# Allegro board C108P02-OLed dis-board-A03.brd
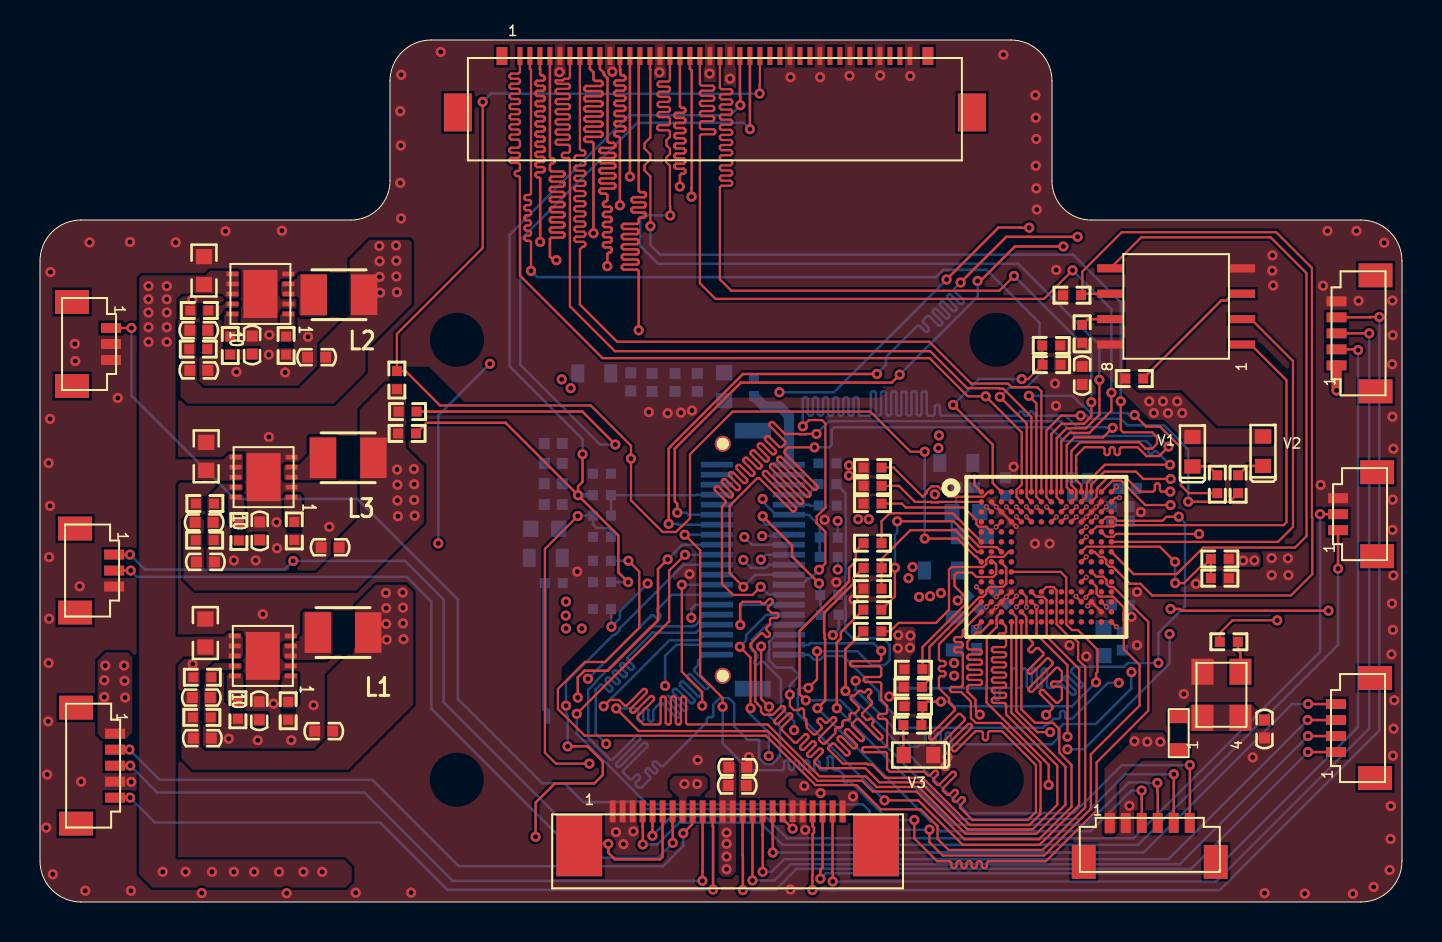
[diagram p0: board, top side]
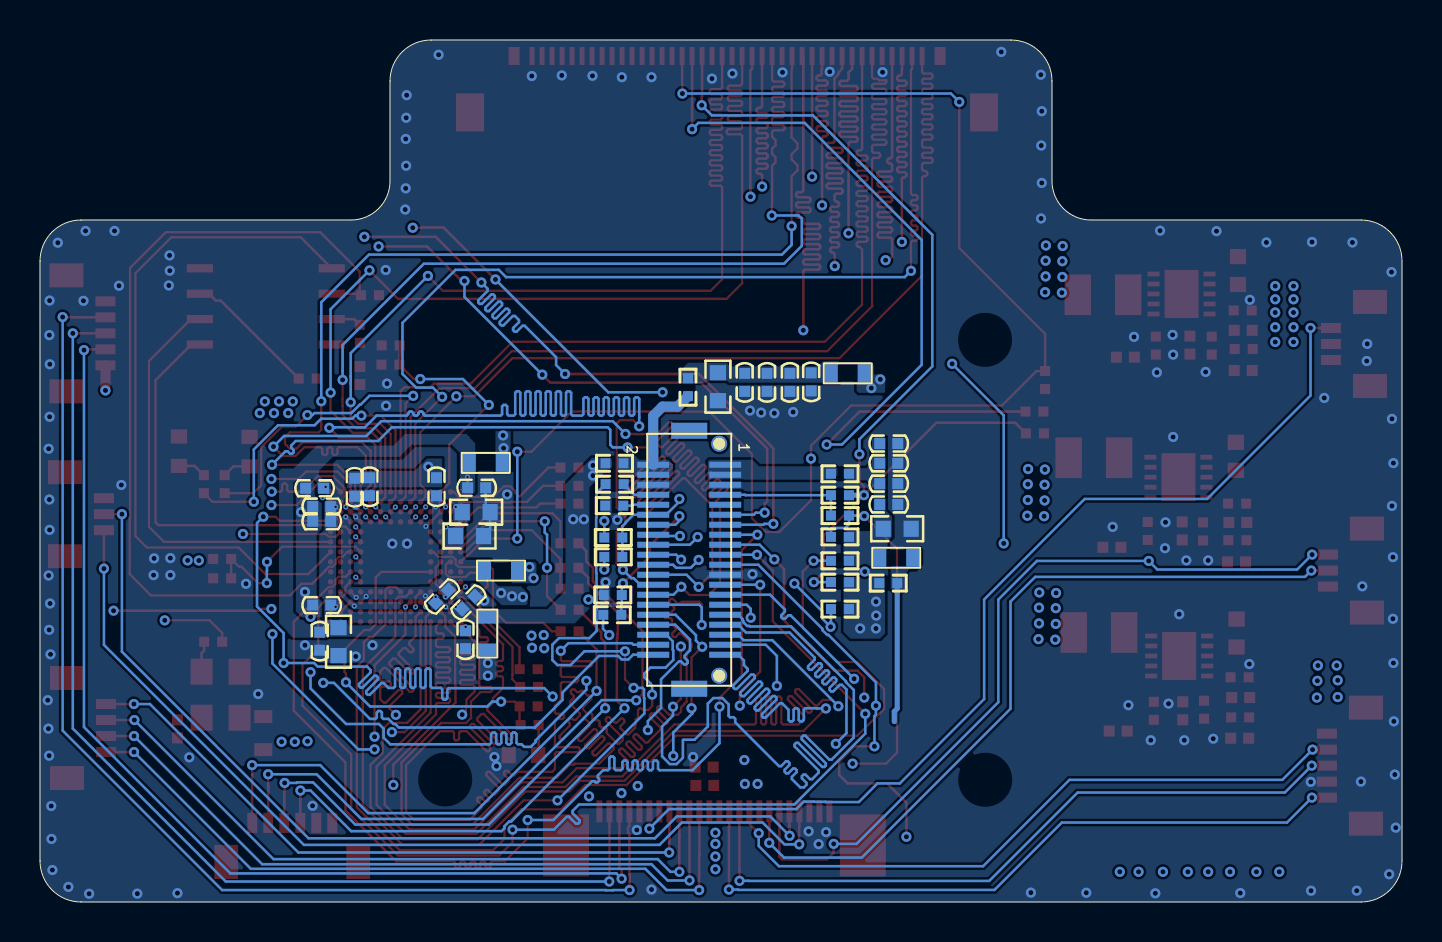
[diagram p1: board, bottom side, seen from below]

Outline 68.1 x 43.1 mm; copper layers: TOP, G, P, BOTTOM. Coordinates in mm from the lower left corner of the outline.
Outline path: 0,32.05 arc(0.6,33.5) 2.05,34.1 15.51,34.1 arc(16.93,34.67) 17.5,36.09 17.5,41.05 arc(18.1,42.5) 19.55,43.1 48.55,43.1 arc(50,42.5) 50.6,41.05 50.6,36.09 arc(51.17,34.67) 52.59,34.1 66.05,34.1 arc(67.5,33.5) 68.1,32.05 68.1,32.05 68.1,2.05 68.1,2.05 arc(67.5,0.6) 66.05,0 2.05,0 arc(0.6,0.6) 0,2.05 0,32.05

## Design rules (mm)
net group BT1120: nets VOU1120 CLK VOU1120 DATA0 VOU1120 DATA1 VOU1120 DATA2 VOU1120 DATA3 VOU1120 DATA4 VOU1120 DATA5 VOU1120 DATA6 VOU1120 DATA7 VOU1120 DATA8 VOU1120 DATA9 VOU1120 DATA10 VOU1120 DATA11 VOU1120 DATA12 VOU1120 DATA13 VOU1120 DATA14 VOU1120 DATA15
net group RGB: nets OLED0 DATA0 OLED0 DATA1 OLED0 DATA2 OLED0 DATA3 OLED0 DATA4 OLED0 DATA5 OLED0 DATA6 OLED0 DATA7 OLED0 DATA8 OLED0 DATA9 OLED0 DATA10 OLED0 DATA11 OLED0 DATA12 OLED0 DATA13 OLED0 DATA14 OLED0 DATA15 OLED0 DATA16 OLED0 DATA17 OLED0 DATA18 OLED0 DATA19 OLED0 DATA20 OLED0 DATA21 OLED0 DATA22 OLED0 DATA23 OLED0 PCLK

## Placement (name value [footprint] x y rotation side)
C1  4.7uF  [C0603]  25.24 18.66 180 bottom
C2  0.1uF  [C0402]  25.66 19.88 180 bottom
C3  0.1uF  [C0402]  25.66 20.92 180 bottom
C4  0.1uF  [C0402]  25.66 21.93 180 bottom
C5  0.1uF  [C0402]  25.66 22.92 180 bottom
C6  4.7uF  [C0603]  34.2 25.77 270 bottom
C7  0.1uF  [C0402]  32.87 25.98 270 bottom
C8  0.1uF  [C0402]  31.75 25.98 270 bottom
C9  0.1uF  [C0402]  30.61 25.98 270 bottom
C10  0.1uF  [C0402]  29.54 26.01 270 bottom
C11  0.1uF  [C0402]  34.89 6.74 0 top
C12  0.1uF  [C0402]  34.86 5.83 0 top
C13  4.7uF  [C0603]  53.18 13.02 270 bottom
C14  0.1uF  [C0402]  54.12 13.04 270 bottom
C15  0.1uF  [C0402]  46.27 20.71 180 bottom
C16  0.1uF  [C0402]  46.83 13.12 270 bottom
C17  0.1uF  [C0402]  54.37 20.69 0 bottom
C18  4.7uF  [C0603]  46.62 18.3 180 bottom
C19  0.1uF  [C0402]  48 15.28 315 bottom
C20  0.1uF  [C0402]  51.63 20.76 90 bottom
C21  0.1uF  [C0402]  48.27 20.76 90 bottom
C22  0.1uF  [C0402]  52.36 20.74 90 bottom
C27  4.7uF  [C0603]  46.29 19.49 180 bottom
C28  0.1uF  [C0402]  54.01 14.84 0 bottom
C29  0.1uF  [C0402]  46.67 14.97 135 bottom
C30  0.1uF  [C0402]  54.01 19.77 0 bottom
C31  0.1uF  [C0402]  54.01 19.04 0 bottom
C32  0.1uF  [C0402]  52.11 26.33 270 top
C33  10nF  [C0402]  61.23 8.65 90 top
C39  22pF  [C0402]  8.07 10.22 0 top
C40  4000pF  [C0402]  10.96 9.56 90 top
C41  22uF  [C0402]  14.19 8.55 0 top
C42  22uF  [C0603]  8.27 13.45 90 top
C43  22pF  [C0402]  7.94 28.59 0 top
C44  4000pF  [C0402]  10.61 27.85 90 top
C45  22uF  [C0402]  13.83 27.24 0 top
C46  22uF  [C0603]  8.2 31.57 90 top
C47  22pF  [C0402]  8.21 18.98 0 top
C48  4000pF  [C0402]  10.99 18.55 90 top
C49  22uF  [C0402]  14.51 17.74 0 top
C50  22uF  [C0603]  8.31 22.28 90 top
C51  22uF  [C0402]  8.12 8.19 180 top
C52  22uF  [C0402]  8.27 17 180 top
C53  22uF  [C0402]  7.94 26.58 180 top
D1  GW1N-9K-MBGA160  [MBGA160_8R0_8R0_0R50]  50.32 17.26 0 top
D2  GD25LQ128CSIG  [SOP8]  56.81 29.78 90 top
D3  XTAL 27MHZ  [SMD3225-4P]  59.07 10.36 90 top
J1  OLED  [DF12-40DS]  35.64 17.11 270 bottom
J2  Interface Control  [2-1734839-4]  34.38 2.88 0 top
J3  Image Processing 1  [20455-040E-76]  33.75 40.43 0 top
J5  Encoder  [SM05B-SURS-TF]  65.93 28.43 90 top
J6  Power  [SM03B-SURS-TF]  2.45 27.9 270 top
J7  Loud  [SM04B-SURS-TF]  65.9 8.7 90 top
J8  AN_LEFT  [SM03B-SURS-TF]  66 19.39 90 top
J9  AN_RIGHT  [SM03B-SURS-TF]  2.6 16.57 270 top
J10  Micro  [SM05B-SURS-TF]  2.66 6.82 270 top
L1  2.2UH  [SL1008H]  15.15 13.47 0 top
L2  2.2UH  [SL1008H]  14.95 30.36 0 top
L3  2.2UH  [SL1008H]  15.41 22.21 0 top
LB1  120R-100MHz  [L0603]  25.29 17.21 0 bottom
LB2  120R-100MHz  [L0603]  27.71 26.43 0 bottom
LB3  120R-100MHz  [L0603]  45.81 21.96 0 bottom
LB4  120R-100MHz  [L0603]  45.05 16.57 0 bottom
LB5  120R-100MHz  [L0603]  45.73 13.42 90 bottom
LB6  120R-100MHz  [L0603]  56.94 8.44 90 top
R1  10K  [R0402]  39.39 19.82 0 bottom
R2  10K  [R0402]  17.85 26.1 270 top
R3  0  [R0402]  35.7 25.74 270 bottom
R4  0  [R0402]  39.49 14.36 0 bottom
R5  NC  [R0402]  39.46 15.35 180 bottom
R6  0  [R0402]  39.44 18.22 0 bottom
R7  10K  [R0402]  28.1 15.99 0 bottom
R8  10K  [R0402]  18.38 24.52 180 top
R9  10K  [R0402]  18.35 23.43 180 top
R10  0  [R0402]  25.69 15.94 180 bottom
R12  NC  [R0402]  39.37 21.94 180 bottom
R13  0  [R0402]  39.37 20.89 0 bottom
R14  0  [R0402]  28.1 21.41 0 bottom
R15  0  [R0402]  28.1 19.32 0 bottom
R16  0  [R0402]  39.44 17.26 0 bottom
R17  0  [R0402]  28.1 20.34 0 bottom
R18  10K  [R0402]  28.1 14.65 180 bottom
R19  10K  [R0402]  28.1 18.26 0 bottom
R20  10K  [R0402]  28.1 17.06 180 bottom
R21  330  [R0402]  58.87 20.89 270 top
R22  330  [R0402]  59.91 20.89 270 top
R23  22  [R0402]  41.63 16.71 0 top
R24  22  [R0402]  41.62 14.62 0 top
R25  22  [R0402]  41.63 17.94 0 top
R26  1K  [R0402]  41.62 15.67 0 top
R27  22  [R0402]  41.62 13.53 0 top
R28  4.7K  [R0402]  52.11 28.41 270 top
R29  4.7K  [R0402]  54.71 26.17 180 top
R30  1K  [R0402]  51.6 30.34 0 top
R31  22  [R0402]  59.44 13.01 0 top
R32  4.7K  [R0402]  43.65 10.75 0 top
R33  4.7K  [R0402]  43.67 11.64 0 top
R34  4.7K  [R0402]  43.67 9.79 0 top
R35  220  [R0402]  43.62 8.85 0 top
R36  4.7K  [R0402]  41.63 20.81 0 top
R37  4.7K  [R0402]  50.58 26.87 180 top
R38  NC  [R0402]  50.56 27.83 180 top
R39  4.7K  [R0402]  41.63 21.72 0 top
R40  10K  [R0402]  41.63 19.92 0 top
R41  33  [R0402]  58.99 17.15 180 top
R42  NC  [R0402]  58.99 16.19 180 top
R45  75k  [R0402]  8.09 9.23 180 top
R46  24k  [R0402]  8.12 11.24 0 top
R47  10k  [R0402]  9.9 9.61 90 top
R48  332k  [R0402]  12.41 9.56 90 top
R49  11k  [R0402]  7.91 27.65 180 top
R50  22k  [R0402]  7.96 29.58 0 top
R51  10k  [R0402]  9.51 27.82 90 top
R52  332k  [R0402]  12.31 27.82 90 top
R53  15k  [R0402]  8.23 18.09 180 top
R54  12k  [R0402]  8.24 19.92 0 top
R55  10k  [R0402]  9.95 18.53 90 top
R56  332k  [R0402]  12.71 18.55 90 top
U3  SGM6010  [TDFN-3_3-10L]  11.14 12.3 270 top
U4  SGM6010  [TDFN-3_3-10L]  11.02 30.4 270 top
U5  SGM6010  [TDFN-3_3-10L]  11.18 21.24 270 top
V1  LED  [LED0603]  57.62 22.52 90 top
V2  LED  [LED0603]  61.15 22.54 90 top
V3  LED  [LED0603]  43.93 7.35 180 top
XS1  -  [SM06B-SURS-TF]  55.49 3.46 0 top

## Library data of the parts
C1-C12 = CAP NP: room: 1
C13-C22 C27-C33 = CAP NP: room: 2
C39-C53 = C_0: room: 3
D1 = GW1N-9K-MBGA160: room: 2
D2 = GD25LQ128CSIG: room: 2
D3 = XTAL: room: 2
J1 = OLED: room: 1
J2 = Interface Control: room: 1
J3 = Image Processing 1: room: 1
J5 = Encoder: room: 1
J6 = Power: room: 1
J7 = Loud: room: 1
J8 = AN_LEFT: room: 1
J9 = AN_RIGHT: room: 1
J10 = Micro: room: 1
L1-L3 = L: room: 3
LB1 LB2 = BEAD: room: 1
LB3-LB6 = BEAD: room: 2
R1-R10 R12-R20 = R: room: 1
R21-R42 = R: room: 2
R45-R56 = R_2: room: 3
U3-U5 = SGM6010_0: room: 3
V1-V3 = LED_1: room: 2
XS1 = SM06B-SURS-TF: room: 2

## Footprints (pads in the part's own frame, mm; a bottom-side part is the same pattern mirrored in y, then rotated)
2-1734839-4
  rect 2.3x3.1 smd: (-7.42,-0.05) (7.42,-0.05)
  rect 0.3x1.1 smd: 1(-5.75,1.65) 2(-5.25,1.65) 3(-4.75,1.65) 4(-4.25,1.65) 5(-3.75,1.65) 6(-3.25,1.65) 7(-2.75,1.65) 8(-2.25,1.65) 9(-1.75,1.65) 10(-1.25,1.65) 11(-0.75,1.65) 12(-0.25,1.65) 13(0.25,1.65) 14(0.75,1.65) 15(1.25,1.65) 16(1.75,1.65) 17(2.25,1.65) 18(2.75,1.65) 19(3.25,1.65) 20(3.75,1.65) 21(4.25,1.65) 22(4.75,1.65) 23(5.25,1.65) 24(5.75,1.65)
20455-040E-76
  rect 1.4x1.9 smd: (-12.85,-0.95) (12.85,-0.95)
  rect 0.55x0.9 smd: (-10.65,1.87) (10.65,1.87)
  rect 0.25x0.9 smd: 1(-9.75,1.87) 2(-9.25,1.87) 3(-8.75,1.87) 4(-8.25,1.87) 5(-7.75,1.87) 6(-7.25,1.87) 7(-6.75,1.87) 8(-6.25,1.87) 9(-5.75,1.87) 10(-5.25,1.87) 11(-4.75,1.87) 12(-4.25,1.87) 13(-3.75,1.87) 14(-3.25,1.87) 15(-2.75,1.87) 16(-2.25,1.87) 17(-1.75,1.87) 18(-1.25,1.87) 19(-0.75,1.87) 20(-0.25,1.87) 21(0.25,1.87) 22(0.75,1.87) 23(1.25,1.87) 24(1.75,1.87) 25(2.25,1.87) 26(2.75,1.87) 27(3.25,1.87) 28(3.75,1.87) 29(4.25,1.87) 30(4.75,1.87) 31(5.25,1.87) 32(5.75,1.87) 33(6.25,1.87) 34(6.75,1.87) 35(7.25,1.87) 36(7.75,1.87) 37(8.25,1.87) 38(8.75,1.87) 39(9.25,1.87) 40(9.75,1.87)
C0402
  rect 0.551x0.551 smd: 1(-0.45,0) 2(0.45,0)
C0603
  rect 0.762x0.813 smd: 1(-0.699,0) 2(0.699,0)
DF12-40DS
  rect 0.8x1.8 smd: (-6.45,0) (6.45,0)
  round 0.8 hole 0.6: (-5.8,1.5) (5.8,1.5)
  rect 0.3x1.6 smd: 1(-4.75,1.8) 2(-4.75,-1.8) 3(-4.25,1.8) 4(-4.25,-1.8) 5(-3.75,1.8) 6(-3.75,-1.8) 7(-3.25,1.8) 8(-3.25,-1.8) 9(-2.75,1.8) 10(-2.75,-1.8) 11(-2.25,1.8) 12(-2.25,-1.8) 13(-1.75,1.8) 14(-1.75,-1.8) 15(-1.25,1.8) 16(-1.25,-1.8) 17(-0.75,1.8) 18(-0.75,-1.8) 19(-0.25,1.8) 20(-0.25,-1.8) 21(0.25,1.8) 22(0.25,-1.8) 23(0.75,1.8) 24(0.75,-1.8) 25(1.25,1.8) 26(1.25,-1.8) 27(1.75,1.8) 28(1.75,-1.8) 29(2.25,1.8) 30(2.25,-1.8) 31(2.75,1.8) 32(2.75,-1.8) 33(3.25,1.8) 34(3.25,-1.8) 35(3.75,1.8) 36(3.75,-1.8) 37(4.25,1.8) 38(4.25,-1.8) 39(4.75,1.8) 40(4.75,-1.8)
L0603
  rect 0.65x0.9 smd: 1(-0.825,0) 2(0.825,0)
LED0603
  rect 0.711x0.813 smd: A(0.737,0) C(-0.737,0)
MBGA160_8R0_8R0_0R50
  round 0.28 smd: A1(-3.25,3.25) A2(-2.75,3.25) A3(-2.25,3.25) A4(-1.75,3.25) A5(-1.25,3.25) A6(-0.75,3.25) A7(-0.25,3.25) A8(0.25,3.25) A9(0.75,3.25) A10(1.25,3.25) A11(1.75,3.25) A12(2.25,3.25) A13(2.75,3.25) A14(3.25,3.25) B1(-3.25,2.75) B2(-2.75,2.75) B3(-2.25,2.75) B4(-1.75,2.75) B5(-1.25,2.75) B6(-0.75,2.75) B7(-0.25,2.75) B8(0.25,2.75) B9(0.75,2.75) B10(1.25,2.75) B11(1.75,2.75) B12(2.25,2.75) B13(2.75,2.75) B14(3.25,2.75) C1(-3.25,2.25) C2(-2.75,2.25) C3(-2.25,2.25) C4(-1.75,2.25) C5(-1.25,2.25) C6(-0.75,2.25) C7(-0.25,2.25) C8(0.25,2.25) C9(0.75,2.25) C10(1.25,2.25) C11(1.75,2.25) C12(2.25,2.25) C13(2.75,2.25) C14(3.25,2.25) D1(-3.25,1.75) D2(-2.75,1.75) D3(-2.25,1.75) D4(-1.75,1.75) D5(-1.25,1.75) D6(-0.75,1.75) D7(-0.25,1.75) D8(0.25,1.75) D9(0.75,1.75) D10(1.25,1.75) D11(1.75,1.75) D12(2.25,1.75) D13(2.75,1.75) D14(3.25,1.75) E1(-3.25,1.25) E2(-2.75,1.25) E3(-2.25,1.25) E4(-1.75,1.25) E11(1.75,1.25) E12(2.25,1.25) E13(2.75,1.25) E14(3.25,1.25) F1(-3.25,0.75) F2(-2.75,0.75) F3(-2.25,0.75) F4(-1.75,0.75) F11(1.75,0.75) F12(2.25,0.75) F13(2.75,0.75) F14(3.25,0.75) G1(-3.25,0.25) G2(-2.75,0.25) G3(-2.25,0.25) G4(-1.75,0.25) G11(1.75,0.25) G12(2.25,0.25) G13(2.75,0.25) G14(3.25,0.25) H1(-3.25,-0.25) H2(-2.75,-0.25) H3(-2.25,-0.25) H4(-1.75,-0.25) H11(1.75,-0.25) H12(2.25,-0.25) H13(2.75,-0.25) H14(3.25,-0.25) J1(-3.25,-0.75) J2(-2.75,-0.75) J3(-2.25,-0.75) J4(-1.75,-0.75) J11(1.75,-0.75) J12(2.25,-0.75) J13(2.75,-0.75) J14(3.25,-0.75) K1(-3.25,-1.25) K2(-2.75,-1.25) K3(-2.25,-1.25) K4(-1.75,-1.25) K11(1.75,-1.25) K12(2.25,-1.25) K13(2.75,-1.25) K14(3.25,-1.25) L1(-3.25,-1.75) L2(-2.75,-1.75) L3(-2.25,-1.75) L4(-1.75,-1.75) L5(-1.25,-1.75) L6(-0.75,-1.75) L7(-0.25,-1.75) L8(0.25,-1.75) L9(0.75,-1.75) L10(1.25,-1.75) L11(1.75,-1.75) L12(2.25,-1.75) L13(2.75,-1.75) L14(3.25,-1.75) M1(-3.25,-2.25) M2(-2.75,-2.25) M3(-2.25,-2.25) M4(-1.75,-2.25) M5(-1.25,-2.25) M6(-0.75,-2.25) M7(-0.25,-2.25) M8(0.25,-2.25) M9(0.75,-2.25) M10(1.25,-2.25) M11(1.75,-2.25) M12(2.25,-2.25) M13(2.75,-2.25) M14(3.25,-2.25) N1(-3.25,-2.75) N2(-2.75,-2.75) N3(-2.25,-2.75) N4(-1.75,-2.75) N5(-1.25,-2.75) N6(-0.75,-2.75) N7(-0.25,-2.75) N8(0.25,-2.75) N9(0.75,-2.75) N10(1.25,-2.75) N11(1.75,-2.75) N12(2.25,-2.75) N13(2.75,-2.75) N14(3.25,-2.75) P1(-3.25,-3.25) P2(-2.75,-3.25) P3(-2.25,-3.25) P4(-1.75,-3.25) P5(-1.25,-3.25) P6(-0.75,-3.25) P7(-0.25,-3.25) P8(0.25,-3.25) P9(0.75,-3.25) P10(1.25,-3.25) P11(1.75,-3.25) P12(2.25,-3.25) P13(2.75,-3.25) P14(3.25,-3.25)
R0402
  rect 0.5x0.5 smd: 1(-0.45,0) 2(0.45,0)
SL1008H
  rect 1.321x2.032 smd: 1(-1.26,0) 2(1.26,0)
SM03B-SURS-TF
  rect 1.2x1.7 smd: (-2.1,-0.85) (2.1,-0.85)
  rect 0.5x1 smd: 1(-0.8,1.1) 2(0,1.1) 3(0.8,1.1)
SM04B-SURS-TF
  rect 1.2x1.7 smd: (-2.5,-0.85) (2.5,-0.85)
  rect 0.5x1 smd: 1(-1.2,1.1) 2(-0.4,1.1) 3(0.4,1.1) 4(1.2,1.1)
SM05B-SURS-TF
  rect 1.2x1.7 smd: (-2.9,-0.85) (2.9,-0.85)
  rect 0.5x1 smd: 1(-1.6,1.1) 2(-0.8,1.1) 3(0,1.1) 4(0.8,1.1) 5(1.6,1.1)
SM06B-SURS-TF
  rect 1.2x1.7 smd: (-3.3,-1.45) (3.3,-1.45)
  rect 0.5x1 smd: 1(-2,0.5) 2(-1.2,0.5) 3(-0.4,0.5) 4(0.4,0.5) 5(1.2,0.5) 6(2,0.5)
SMD3225-4P
  rect 1.3x1.1 smd: 1(-1.15,0.95) 2(1.15,0.95) 3(1.15,-0.95) 4(-1.15,-0.95)
SOP8
  rect 0.41x1.31 smd: 1(-1.905,-3.295) 2(-0.635,-3.295) 3(0.635,-3.295) 4(1.905,-3.295) 5(1.905,3.295) 6(0.635,3.295) 7(-0.635,3.295) 8(-1.905,3.295)
TDFN-3_3-10L
  rect 0.24x0.6 smd: 1(1,1.4) 2(0.5,1.4) 3(0,1.4) 4(-0.5,1.4) 5(-1,1.4) 6(-1,-1.4) 7(-0.5,-1.4) 8(0,-1.4) 9(0.5,-1.4) 10(1,-1.4)
  rect 2.4x1.7 smd: 11(0,0)

## Nets
GND: C1.2 C2.2 C3.2 C4.2 C5.2 C6.2 C7.2 C8.2 C9.2 C10.2 C11.2 C12.2 C13.2 C14.2 C15.2 C16.2 C17.2 C18.2 C19.2 C20.2 C21.2 C22.2 C27.2 C28.2 C29.2 C30.2 C31.2 C32.2 C33.1 C40.2 C41.1 C42.2 C44.2 C45.1 C46.2 C48.2 C49.1 C50.2 C51.1 C52.1 C53.1 D1.B2(VSS#B2) D1.B13(VSS#B13) D1.C3(VSS#C3) D1.C12(VSS#C12) D1.D4(VSS#D4) D1.D11(VSS#D11) D1.L4(VSS#L4) D1.L11(VSS#L11) D1.M3(VSS#M3) D1.M12(VSS#M12) D1.N2(VSS#N2) D1.N13(VSS#N13) D2.4(VSS) D3.2(GND) J1.5 J1.6 J1.23 J2.1 J2.2 J2.3 J2.19 J2.20 J3.5 J3.10 J3.15 J3.20 J3.22 J3.28 J3.31 J3.34 J3.37 J3.40 J5.5 J6.2 J6.3 J8.3 J9.3 J10.4 R1.2 R5.1 R26.1 R30.1 R36.1 R37.1 R39.1 R40.1 R42.1 R46.1 R48.1 R50.1 R52.1 R54.1 R56.1 U3.2(GND) U3.5(PGND) U3.11(GND2) U4.2(GND) U4.5(PGND) U4.11(GND2) U5.2(GND) U5.5(PGND) U5.11(GND2) V3.C(CATHODE) XS1.2
VCC1V2: C13.1 C14.1 C15.1 C16.1 C17.1 D1.A1(VCC#A1) D1.A14(VCC#A14) D1.P1(VCC#P1) D1.P14(VCC#P14) LB3.2
VCC1V8: C18.1 C19.1 C20.1 C21.1 C22.1 C32.1 D1.C4(VCCO0#C4) D1.C11(VCCO0#C11) D1.D3(VCCO3#D3) D1.D12(VCCO1#D12) D1.L3(VCCO3#L3) D1.L12(VCCO1#L12) D1.M4(VCCO2#M4) D1.M11(VCCO2#M11) D2.8(VCC) LB4.2 LB6.1 R28.2 R29.2 R32.1 R33.1 R34.1 R38.1 R41.1 V1.A(ANODE) V2.A(ANODE) XS1.1
VCC1V8 OLED: C1.1 C2.1 C3.1 C4.1 C5.1 LB1.2 R14.1 R19.1 R20.2
VCC3V3: C27.1 C28.1 C29.1 C30.1 C31.1 D1.C2(VCCX#C2) D1.C13(VCCX#C13) D1.M2(VCCX#M2) D1.M13(VCCX#M13) J2.8 J2.24 J5.1 J10.1 LB5.2 R12.1
VCC5V OLED: C6.1 C7.1 C8.1 C9.1 C10.1 LB2.2 R3.1
AN_LEFT_1_IN: J2.4 J8.1
AN_LEFT_2_IN: J2.5 J8.2
AN_RIGHT_1_IN: J2.6 J9.1
AN_RIGHT_2_IN: J2.7 J9.2
BM_A: J2.22 J5.2
BM_B: J2.23 J5.3
BM_SWITCH_IN: J2.21 J5.4
DONE: D1.J4(IOL14A/DONE) R34.2 R35.2
FPGA FASTRD N: D1.G11(IOR13A/FASTRD_N/D3/LVDS) R41.2 R42.2
FPGA LED0: D1.B7(IOT28A/GCLKT_0) R21.2
FPGA LED1: D1.B8(IOT28B/GCLKT_0) R22.2
FPGA MCLK: D1.G12(IOR12B/MCLK/D4) D2.6(SCLK) R30.2
FPGA MCS N: D1.E12(IOR12A/MCS_N/D5) D2.1(C\S\)
FPGA MI: D1.F14(IOR11A/MI/D7/LVDS) D2.2(SO)
FPGA MO: D1.G14(IOR11B/MO/D6/LVDS) D2.5(SI)
FPGA PLL: D1.B14(IOR5A/RPLL_T_IN) R31.1
FPGA SCL: D1.M6(IOB17B/LVDS) R15.1 R19.2
FPGA SDA: D1.L7(IOB21A/LVDS/X16) R6.2 R20.1
FPGA TCK: D1.G1(IOL11B/TCK/LVDS) R23.2 R26.2
FPGA TDI: D1.G4(IOL12B/TDI) R27.2
FPGA TDO: D1.G3(IOL13A/TDO/LVDS) R24.2
FPGA TMS: D1.F1(IOL11A/TMS/LVDS) R25.2
JTAGSEL N: D1.E2(IOL5A/JTAGSEL_N/LPLL_T_IN) R40.2
MODE0: D1.B1(IOT5A/MODE0) R36.2
MODE1: D1.A3(IOT6B/MODE1) R37.2 R38.2
MODE2: D1.A2(IOT5B/MODE2) R39.2
OLED0 DATA0: D1.P5(IOB15B/LVDS) J1.39
OLED0 DATA1: D1.L1(IOB4A/LVDS/X16) J1.40
OLED0 DATA2: D1.N5(IOB15A/LVDS/X16) J1.37
OLED0 DATA3: D1.M1(IOB4B/LVDS) J1.38
OLED0 DATA4: D1.P4(IOB13B/LVDS) J1.35
OLED0 DATA5: D1.N1(IOB6A/LVDS/X16) J1.36
OLED0 DATA6: D1.N4(IOB13A/LVDS/X16) J1.33
OLED0 DATA7: D1.P2(IOB6B/LVDS) J1.34
OLED0 DATA8: D1.M5(IOB11B/LVDS) J1.31
OLED0 DATA9: D1.N3(IOB8A/LVDS/X16) J1.32
OLED0 DATA10: D1.L5(IOB11A/LVDS/X16) J1.29
OLED0 DATA11: D1.P3(IOB8B/LVDS) J1.30
OLED0 DATA12: D1.E13(IOR8B/LVDS) J1.27
OLED0 DATA13: D1.A11(IOT36A) J1.28
OLED0 DATA14: D1.D13(IOR8A/LVDS) J1.25
OLED0 DATA15: D1.A10(IOT36B) J1.26
OLED0 DATA16: D1.K12(IOR26A/LVDS) J1.19
OLED0 DATA17: D1.B12(IOT38B) J1.22
OLED0 DATA18: D1.H11(IOR24B/LVDS) J1.17
OLED0 DATA19: D1.A12(IOT42A) J1.20
OLED0 DATA20: D1.J12(IOR24A/LVDS) J1.15
OLED0 DATA21: D1.A13(IOT42B) J1.18
OLED0 DATA22: D1.F11(IOR22B/LVDS) J1.13
OLED0 DATA23: D1.D10(IOT44A) J1.16
OLED0 DE: D1.K11(IOR26B/LVDS) J1.21
OLED0 HS: D1.E11(IOR22A/LVDS) J1.11
OLED0 PCLK: D1.B11(IOT38A) J1.24
OLED0 SERADD: J1.10 R1.1
OLED0 VS F: D1.C10(IOT44B) R4.2
OLED0 VS_F: J1.14 R4.1 R5.2
OLED IMAGE RESET: D1.H1(IOL17A/LVDS) J3.25 R2.1
OLED RESET: D1.L6(IOB17A/LVDS/X16) R13.2
OLED SCL: J3.23 R7.2 R9.1 R17.1
OLED SDA: J1.12 J3.24 R6.1 R8.1 R16.1
OLED_RESET: J1.8 R13.1
POW1V2: C43.1 C45.2 C53.2 L2.2 LB3.1 R49.2
POW1V8: C47.1 C49.2 C52.2 L3.2 LB4.1 R2.2 R7.1 R8.2 R9.2 R10.1 R18.2 R53.2
POW3V3: C39.1 C41.2 C51.2 L1.2 LB5.1 R45.2
POW5V: C11.1 C12.1 C42.1 C46.1 C50.1 J2.12 J2.13 LB2.1 U3.6(PVDD1) U3.7(PVDD2) U3.8(AVDD) U4.6(PVDD1) U4.7(PVDD2) U4.8(AVDD) U5.6(PVDD1) U5.7(PVDD2) U5.8(AVDD)
READY: D1.H2(IOL14B/READY) R33.2
RECONFIG N: D1.H3(IOL13B/RECONFIG_N/LVDS) R32.2
SCK: J2.11 J10.5
SD: J2.10 J10.3
SD_AN: J2.18 J6.1
SP_N1: J2.16 J7.3
SP_N2: J2.17 J7.4
SP_P1: J2.14 J7.1
SP_P2: J2.15 J7.2
VOU1120 CLK: D1.A8(IOT30A) J3.21
VOU1120 DATA0: D1.B5(IOT14A) J3.1
VOU1120 DATA1: D1.B6(IOT14B) J3.2
VOU1120 DATA2: D1.C5(IOT18A) J3.3
VOU1120 DATA3: D1.D5(IOT18B) J3.4
VOU1120 DATA4: D1.A6(IOT22A) J3.6
VOU1120 DATA5: D1.A7(IOT22B) J3.7
VOU1120 DATA6: D1.C6(IOT24A) J3.8
VOU1120 DATA7: D1.D6(IOT24B) J3.9
VOU1120 DATA8: D1.C7(IOT26A) J3.11
VOU1120 DATA9: D1.C9(IOT34B) J3.12
VOU1120 DATA10: D1.D9(IOT34A) J3.13
VOU1120 DATA11: D1.B10(IOT33B) J3.14
VOU1120 DATA12: D1.B9(IOT33A/X16) J3.16
VOU1120 DATA13: D1.D8(IOT32B) J3.17
VOU1120 DATA14: D1.C8(IOT32A) J3.18
VOU1120 DATA15: D1.A9(IOT30B) J3.19
WS: J2.9 J10.2
N69070: J1.2 J1.4 R3.2 R12.2
N75676: J1.1 J1.3 R14.2
N14665792: R23.1 XS1.3
N14665882: R24.1 XS1.4
N14665886: R25.1 XS1.5
N14665890: R27.1 XS1.6
N14667687: D2.7(H\O\L\D\) R28.1
N14668737: D2.3(W\P\) R29.1
N14669383: C33.2 D3.1(TRI-STATE) D3.4(VCC) LB6.2
N14669821: D3.3(OUTPUT) R31.2
N14977713: R48.2 U3.1(E\N\/RT)
N14977721: L1.1 U3.3(SW1) U3.4(SW2)
N14977791: C39.2 R45.1 R46.2 U3.9(FB)
N14977811: R47.2 U3.10(COMP)
N14977909: C40.1 R47.1
N14978938: L2.1 U4.3(SW1) U4.4(SW2)
N14978992: C43.2 R49.1 R50.2 U4.9(FB)
N14978996: R51.2 U4.10(COMP)
N14979110: C44.1 R51.1
N14979344: R52.2 U4.1(E\N\/RT)
N14980095: L3.1 U5.3(SW1) U5.4(SW2)
N14980165: C47.2 R53.1 R54.2 U5.9(FB)
N14980169: R55.2 U5.10(COMP)
N14980283: C48.1 R55.1
N14980517: R56.2 U5.1(E\N\/RT)
N15019447: LB1.1 R10.2
N15020889: J1.7 R15.2 R17.2
N15022206: R16.2 R18.1
N15041456: R21.1 V1.C(CATHODE)
N146648081: R22.1 V2.C(CATHODE)
N146708610: R35.1 V3.A(ANODE)

Pads without a net: D1 A4 A5 B3 B4 C1 C14 D1 D2 D7 D14 E1 E3 E4 E14 F2 F3 F4 F12 F13 G2 G13 H4 H12 H13 H14 J1 J2 J3 J11 J13 J14 K1 K2 K3 K4 K13 K14 L2 L8 L9 L10 L13 L14 M7 M8 M9 M10 M14 N6 N7 N8 N9 N10 N11 N12 N14 P6 P7 P8 P9 P10 P11 P12 P13; J1 9; J3 26 27 29 30 32 33 35 36 38 39

## Via types
v1: diameter 0.508, hole 0.254, TOP to BOTTOM, 402 vias
v2: diameter 0.254, hole 0.127, TOP to BOTTOM, 43 vias

## Routing (per net, layer and track width the routed paths; a pad name or vN(x,y) marks a point on that pad's centre or on a via; arc(x,y) is an arc through that point)
GND: length 8.2
  TOP w0.114: D1.N13 D1.M12 52.38,14.82 v2(52.38,14.8) ; D1.L4 v2(48.32,15.26) D1.M3 v2(47.82,14.76) D1.N2 ; D1.B2 v2(47.82,19.76) D1.C3 D1.D4 48.8,18.78 v2(48.81,18.78) ; D1.B13 v2(52.81,19.75) D1.C12 v2(52.32,19.26) D1.D11
  BOTTOM w0.127: C15.2 45.82,19.72 45.59,19.49 45.59,18.63 45.92,18.3
  vias: v1(0.36,6.37) v1(0.31,3.72) v1(0.43,21.95) v1(0.45,17.24) v1(0.45,14.16) v1(0.43,11.95) v1(0.41,9.03) v1(0.52,31.5) v1(0.5,24.16) v1(0.5,19.81) v1(0.64,1.39) v1(1.74,27.91) v1(1.76,27.05) v1(1.98,15.78) v1(2.05,6.02) v1(2.26,0.56) v1(2.48,32.98) v1(3.89,25.2) v1(4.5,33) v1(4.56,6.01) v1(4.55,0.56) v1(6.78,32.98) v1(7.61,30.11) v1(7.63,11.9) v1(8.09,0.45) v1(9.28,33.54) v1(9.44,8.16) v1(9.69,17.08) v1(9.82,26.5) v1(10.78,17.08) v1(10.89,8.09) v1(11.14,14.39) v1(11.47,28.36) v1(11.44,27.37) v1(11.44,23.25) v1(11.67,9.92) v1(11.83,18.99) v1(11.85,17.69) v1(12.1,33.57) v1(12.26,26.48) v1(12.33,0.44) v1(12.56,8.09) v1(13.4,28.26) v1(13.68,9.84) v1(14.47,18.76) v1(15.79,0.46) v1(18.06,41.36) v1(18.01,39.54) v1(18.04,37.82) v1(18.01,35.95) v1(18.05,34.18) v1(18.56,0.47) v1(20.04,42.51) v1(25.97,41.49) v1(26.86,16.52) v1(28.61,41.51) v1(28.8,3.49) v1(29.17,2.89) v1(29.67,3.53) v1(30.44,24.5) v1(30.97,41.48) v1(31.38,24.44) v1(32.04,24.47) v1(32.48,16.39) v1(32.6,24.57) v1(32.88,7.1) v1(33.48,41.42) v1(34.5,41.17) v1(35.45,7.25) v1(37.53,41.24) v1(37.53,0.62) v1(38.26,3.6) v1(39.01,41.24) v1(39.23,19.11) v1(39.82,15.99) v1(40.48,41.31) v1(40.68,15.12) v1(42.01,41.33) v1(43.51,41.3) v1(44.74,20.38) v1(45.28,6.79) v1(45.38,7.25) v1(45.89,15.07) v1(48.17,42.36) v1(48.68,21.76) v1(49.77,40.34) v1(49.75,17.92) v1(49.79,39.21) v1(49.81,38.15) v1(49.79,36.81) v1(49.82,35.68) v1(49.84,34.62) v1(50.48,17.92) v1(50.75,25.92) v1(50.81,31.6) v1(50.8,24.81) v1(51.47,12.84) v1(52.31,12.28) v1(54.47,4.81) v1(54.57,14.26) v1(54.85,15.51) v1(54.85,12.84) v1(55.04,19.49) v1(57.19,10.4) v1(57.8,15.91) v1(60.64,7.23) v1(61.23,0.44) v1(61.58,17.19) v1(61.58,16.34) v1(61.62,32.33) v1(61.61,31.57) v1(61.66,30.83) v1(62.4,17.18) v1(62.42,16.34) v1(63.24,0.42) v1(64.04,20.85) v1(64.15,30.81) v1(64.38,33.55) v1(65.65,0.41) v1(65.82,33.55) v1(65.93,30.06) v1(66.68,0.75) v1(67.21,32.97) v1(67.48,1.6) v1(67.58,12.38) v1(67.54,4.8) v1(67.53,3.15) v1(67.62,30.07) v1(67.63,28.34) v1(67.61,26.89) v1(67.62,24.26) v1(67.67,22.66) v1(67.63,20.12) v1(67.62,18.61) v1(67.67,16.33) v1(67.6,14.93) v1(67.64,13.61) v1(67.68,8.67) v1(67.64,7.32) v1(67.72,10.09)
VCC1V2: length 2.5
  TOP w0.114: D1.A1 46.73,20.85 v2(46.73,21.25) ; D1.A14 v2(53.82,20.76) ; D1.P14 v2(53.82,13.76) ; D1.P1 v2(46.82,13.76)
  BOTTOM w0.102: C15.1 46.72,21.24 v2(46.73,21.25)
VCC1V8: length 3
  TOP w0.114: v2(51.79,15.28) D1.M11 ; D1.D3 v2(47.81,18.75) ; D1.C11 v2(52.32,19.76) ; D1.D12 v2(52.82,19.26) ; D1.C4 v2(48.32,19.76) ; v2(48.83,15.3) 48.57,15.04 D1.M4 ; v2(52.29,15.23) D1.L12 ; D1.L3 v2(47.82,15.26)
  vias: v1(42.89,12.69) v1(42.92,13.35) v1(43.52,13.32) v1(43.5,12.71) v1(43.96,15.25) v1(44.51,15.29) v1(45.05,15.45) v1(54.73,8.04) v1(55.36,8.01) v1(55.46,25.03) v1(55.69,24.45) v1(56.02,8.01) v1(56.15,25.03) v1(56.4,24.45) v1(56.86,25.03) v1(57.11,24.45) v1(60.16,17.07) v1(60.72,17.08)
VCC3V3: length 50.9
  TOP w0.114: v2(47.32,14.76) D1.M2 ; D1.C2 v2(47.32,19.76) ; D1.C13 v2(53.32,19.76) ; D1.M13 v2(53.32,14.76) ; 3.39,8.42 J10.1
  TOP w0.508: J5.1 v1(64.83,25.58)
  P w0.508: v1(64.83,25.58) 65.9,24.51 65.9,16.19 65.52,15.81 64.28,15.81 62.73,14.26 62.73,4.46 60.57,2.3 43.63,2.3 v1(40.65,5.28)
  vias: v1(3.27,11.82) v1(3.21,11.09) v1(3.21,10.25) v1(4.21,11.82) v1(4.23,11.06) v1(4.26,10.22) v1(32.22,5.9) v1(32.86,5.9) v1(38.22,5.8) v1(39.03,5.45) v1(40.45,21.83) v1(40.45,21.32) v1(40.91,19.14) v1(41.44,19.14)
AN_LEFT_1_IN: length 47.2
  TOP w0.127: J2.4 30.13,3.79 30.14,3.78 v1(30.14,2.88) ; J8.1 v1(64.9,16.67)
  BOTTOM w0.127: v1(64.9,16.67) 64.9,12.86 54.9,2.86 37.12,2.86 36.01,3.97 31.97,3.97 30.88,2.88 v1(30.14,2.88)
AN_LEFT_2_IN: length 47.1
  TOP w0.127: J2.5 30.63,3.79 30.62,3.78 v1(30.62,3.31) ; J8.2 v1(64,19.39)
  BOTTOM w0.127: v1(64,19.39) 64,12.52 54.68,3.19 37.35,3.19 36.26,4.28 31.59,4.28 v1(30.62,3.31)
AN_RIGHT_1_IN: length 39.7
  TOP w0.127: J9.1 v1(4.5,17.37) ; J2.6 31.13,2.26 31,2.13 28.74,2.13 28.42,2.46 v1(28.42,2.91)
  BOTTOM w0.127: v1(4.5,17.37) 5.24,16.62 12.23,16.62 v1(12.66,17.05) 18.25,17.05 20.18,15.12 20.18,9.99 27.27,2.91 v1(28.42,2.91)
AN_RIGHT_2_IN: length 38.9
  TOP w0.127: v1(31.64,2.96) 31.64,3.78 31.63,3.79 J2.7 ; J9.2 v1(4.54,16.57)
  BOTTOM w0.127: v1(31.64,2.96) 30.9,2.22 27.01,2.22 19.57,9.66 19.57,15.02 18.34,16.26 4.85,16.26 v1(4.54,16.57)
BM_A: length 53.4
  TOP w0.127: v1(65.9,27.6) 65.86,27.63 J5.2 ; v1(39.02,1.17) 39.02,1.61 39.13,1.72 J2.22
  BOTTOM w0.127: v1(65.9,27.6) 65.9,8.75 58.58,1.43 39.28,1.43 v1(39.02,1.17)
BM_B: length 54.9
  TOP w0.127: J5.3 v1(66.46,28.43) ; J2.23 39.63,3.79 39.63,3.79 39.63,1.48 39.64,1.47 v1(39.64,1.02)
  BOTTOM w0.127: v1(39.64,1.02) 58.81,1.02 66.46,8.67 v1(66.46,28.43)
BM_SWITCH_IN: length 58.5
  TOP w0.127: J5.4 66.51,29.23 66.52,29.25 v1(66.97,29.25) ; v1(38.62,0.6) 38.62,1.04 38.61,1.05 38.61,1.33 38.63,1.35 38.63,3.39 38.7,3.46 38.7,3.72 38.63,3.79 J2.21
  BOTTOM w0.127: v1(66.97,29.25) 66.97,8.57 58.99,0.6 39.81,0.6 39.79,0.58 39.46,0.58 39.44,0.6 v1(38.62,0.6)
DONE: length 19.3
  TOP w0.114: R35.2 44.12,8.9 R34.2 44.36,10.02 v1(45.05,10.02) ; v1(52.8,10.98) 52.8,11.43 52.87,11.5 52.87,12.62 51.9,13.6 51.6,13.6 51.31,13.88 51.31,16.22 51.03,16.51 D1.J4
  BOTTOM w0.127: v1(45.05,10.02) 45.49,10.02 45.73,9.78 51.6,9.78 v1(52.8,10.98)
FPGA FASTRD N: length 9.4
  TOP w0.114: v1(56.76,15.94) 57.21,15.94 58.03,16.77 58.16,16.77 R41.2 R42.2 ; D1.G11 52.33,17.77 55.99,17.77 v1(56.75,17.01)
  BOTTOM w0.127: v1(56.75,17.01) 56.75,16.56 56.76,16.56 v1(56.76,15.94)
FPGA LED0: length 18.1
  TOP w0.114: v1(54.73,24.35) 55.19,23.88 55.31,23.77 56,23.77 57.04,22.73 57.04,20.84 57.44,20.44 58.41,20.44 58.41,20.44 R21.2 ; D1.B7 49.82,20.26 49.82,24.43 49.82,24.43 49.82,24.93 v1(49.44,25.31)
  BOTTOM w0.127: v1(54.73,24.35) 54.48,24.35 54.38,24.45 52.53,24.45 52.1,24.88 52.06,24.88 51.63,25.31 v1(49.44,25.31)
FPGA LED1: length 17.1
  TOP w0.114: R22.2 59.48,20.01 57.86,20.01 v1(57.41,20.01) ; D1.B8 50.55,20.01 50.32,20.24 50.32,23.58 51.06,24.32 v1(52.03,24.32)
  BOTTOM w0.127: v1(52.03,24.32) 52.34,24.32 52.49,24.17 54.04,24.17 54.37,23.84 56.2,23.84 57.41,22.62 v1(57.41,20.01)
FPGA MCLK: length 43.5
  TOP w0.114: 52.12,30.41 R30.2 ; 52.12,30.41 52.12,30.42 D2.6 ; 52.12,30.41 52.12,31.52 54.09,33.49 61.81,33.49 63.6,31.7 63.6,19.22 63.62,19.21 63.62,16.39 62.55,15.33 55.61,15.33 55.02,15.91 54.49,15.91 53.81,16.59 53.81,16.61 53.67,16.75 53.65,16.75 53.64,16.76 53.47,16.76 53.31,16.92 53.31,17.11 53.17,17.25 52.99,17.25 52.73,17.51 D1.G12
FPGA MCS N: length 20
  TOP w0.114: D1.E12 52.83,18.77 53.67,18.77 53.74,18.84 62.18,18.84 62.33,18.99 62.33,26.09 60.54,27.88 D2.1
FPGA MI: length 21.1
  TOP w0.114: D1.F14 57.78,18.01 57.79,18 58.12,18 58.12,18.01 61.9,18.01 62.65,18.76 62.65,27.05 60.55,29.15 D2.2
FPGA MO: length 35.4
  TOP w0.114: D1.G14 54.68,16.4 56.84,16.4 58.16,17.72 62.75,17.72 63.33,18.3 63.33,31.44 61.53,33.24 55.07,33.24 D2.5
FPGA PLL: length 29.3
  TOP w0.114: v2(53.97,20.22) 53.96,20.22 53.95,20.2 53.77,20.2 D1.B14 ; v1(61.86,14.08) 59.62,14.08 58.99,13.45 R31.1
  P w0.127: v2(53.97,20.22) 54.2,20.44 54.2,24.62 54.57,25 54.57,25.92 54.7,26.05 60.31,26.05 62.9,23.46 62.9,15.12 v1(61.86,14.08)
FPGA SCL: length 54.8
  TOP w0.114: v1(51.37,8.27) 51.37,11.84 49.83,13.38 49.83,13.91 49.83,13.91 49.83,14.61 49.83,14.61 v2(49.83,14.76) 49.83,14.78 49.6,15.01 D1.M6 ; v1(26.89,19.3) 25.25,17.66 25.25,7.47 25.8,6.92 v1(27.47,6.92)
  P w0.127: v1(51.37,8.27) 51.86,7.78 51.86,4.91 50.81,3.87 45.38,3.87 42.67,6.58 31.44,6.58 31.3,6.44 27.95,6.44 v1(27.47,6.92)
  BOTTOM w0.127: v1(26.89,19.3) 26.91,19.32 R15.1 27.65,18.88 27.83,18.7 28.43,18.7 28.55,18.57 R19.2
FPGA SDA: length 69.8
  TOP w0.114: D1.L7 50.31,15.75 50.67,15.75 50.83,15.59 50.83,13.89 51.47,13.24 51.64,13.24 51.69,13.19 51.7,13.19 51.91,12.99 51.91,12.45 51.91,12.45 51.91,12.11 52.26,11.76 52.26,4.74 50.13,2.6 45.43,2.6 44.88,3.15 44.88,3.79 44.03,4.63 42.04,4.63 40.94,5.73 40.93,5.73 40.82,5.85 38.77,5.85 36.3,8.32 27.23,8.32 26.14,9.41 26.14,9.41 25.9,9.65 25.9,10.65 27.24,12 28.26,12 29.96,13.7 29.96,16.52 v1(29.42,17.06)
  P w0.127: v1(39.89,19.05) 39.86,19.05 39.4,19.52 39.06,19.52 38.6,19.05 37.44,19.05 36.74,19.75 35.96,19.75 34.77,20.94 30.01,20.94 29.42,20.35 v1(29.42,17.06)
  BOTTOM w0.127: R6.2 v1(39.89,19.05) ; R20.1 28.55,17.06 v1(29.42,17.06)
FPGA TCK: length 7.5
  TOP w0.114: R26.2 42.08,15.67 R23.2 42.08,17.15 43.52,18.59 45.77,18.59 46.86,17.5 47.06,17.5 D1.G1
FPGA TDI: length 9.5
  TOP w0.114: D1.G4 48.43,17.51 48.17,17.25 47.78,17.25 47.78,17.26 47.46,17.26 47.32,17.11 47.32,16.9 47.17,16.75 45.58,16.75 45.45,16.62 45.45,14.61 44.79,13.96 42.93,13.96 42.5,13.53 R27.2
FPGA TDO: length 10.6
  TOP w0.114: R24.2 42.75,15.29 v1(42.75,16.71) ; v1(42.86,19.04) 45.68,19.04 46.09,18.63 46.09,18.63 46.97,17.75 47.67,17.75 47.68,17.74 47.84,17.74 D1.G3
  BOTTOM w0.127: v1(42.86,19.04) 42.86,18.48 42.75,18.36 v1(42.75,16.71)
FPGA TMS: length 6.9
  TOP w0.114: R25.2 42.08,19.04 42.47,19.43 42.69,19.43 42.7,19.44 43.03,19.44 43.04,19.43 45.64,19.43 D1.F1
JTAGSEL N: length 6.2
  TOP w0.114: D1.E2 47.31,18.77 46.94,18.77 46.82,18.89 46.82,19.1 46.19,19.73 43.29,19.73 43.09,19.92 R40.2
MODE0: length 5.3
  TOP w0.114: D1.B1 44.94,20.01 44.91,19.98 44.58,19.98 44.55,20.01 43.75,20.01 42.95,20.81 R36.2
MODE1: length 11.7
  TOP w0.114: D1.A3 47.63,20.94 47.63,22.88 v1(45.66,24.85) ; v1(49.09,26.15) 49.41,26.15 R37.2 50.13,27.37 50.11,27.39 R38.2 50.17,27.78
  BOTTOM w0.127: v1(45.66,24.85) 46.95,26.15 v1(49.09,26.15)
MODE2: length 6.7
  TOP w0.114: R39.2 42.68,21.72 44.14,20.26 44.34,20.47 44.34,20.55 44.58,20.78 44.91,20.78 45.43,20.26 47.16,20.26 47.41,20.51 D1.A2
OLED0 DATA0: length 56.4
  TOP w0.114: D1.P5 49.07,9.64 49.75,8.96 50.13,8.96 50.14,8.95 50.47,8.95 50.49,8.96 50.65,8.96 50.97,8.65 50.97,7.46 51.58,6.85 51.58,4.76 49.95,3.14 46.22,3.14 43.83,5.52 41.64,5.52 41.1,6.06 38.88,6.06 36.39,8.55 32.92,8.55 29.93,8.55 v1(28.81,9.68)
  BOTTOM w0.127: J1.39 33.19,12.36 32.91,12.08 32.91,11.85 32.72,11.66 32.72,11.55 33.44,10.83 33.44,10.73 33.36,10.65 33.26,10.65 32.54,11.37 32.43,11.37 32.36,11.3 32.36,11.19 33.08,10.47 33.08,10.37 33.01,10.29 32.9,10.29 32.18,11.01 32.07,11.01 32,10.94 32,10.84 32.72,10.11 32.72,10.01 32.65,9.94 32.54,9.94 31.82,10.66 31.72,10.66 31.64,10.58 31.64,10.48 32.36,9.76 32.36,9.65 32.29,9.58 32.18,9.58 31.46,10.3 31.36,10.3 31.28,10.22 31.28,10.12 32,9.4 32,9.29 31.93,9.22 31.82,9.22 31.1,9.94 31,9.94 30.67,9.61 30.67,9.1 30.6,9.03 30.49,9.03 30.42,9.1 30.42,9.61 30.35,9.69 30.24,9.69 30.17,9.61 30.17,9.1 30.09,9.03 29.99,9.03 29.91,9.1 29.91,9.61 29.84,9.69 29.26,9.69 29.25,9.68 v1(28.81,9.68)
OLED0 DATA1: length 56.5
  TOP w0.114: D1.L1 47.07,15.51 46.83,15.76 v2(46.83,15.76)
  P w0.127: v2(46.83,15.76) 46.5,15.76 46.15,15.42 46.15,15.38 46.29,15.24 46.29,14.77 47.36,13.7 47.36,13.23 47.65,12.95 47.75,12.95 49.15,14.34 49.26,14.34 49.33,14.27 49.33,14.17 47.93,12.77 47.93,12.66 48.01,12.59 48.11,12.59 49.51,13.99 49.62,13.99 49.69,13.91 49.69,13.81 48.29,12.41 48.29,12.3 48.37,12.23 48.47,12.23 49.87,13.63 49.98,13.63 50.05,13.55 50.05,13.45 48.65,12.05 48.65,11.94 48.73,11.87 48.83,11.87 50.23,13.27 50.33,13.27 50.41,13.19 50.41,13.09 49.01,11.69 49.01,11.58 49.09,11.51 49.19,11.51 50.59,12.91 50.69,12.91 50.77,12.83 50.77,12.73 49.37,11.33 49.37,11.22 49.66,10.94 49.66,10.87 49.68,10.84 50.4,10.84 50.47,10.92 50.47,11.93 50.55,12 50.65,12 50.73,11.93 50.73,10.92 50.8,10.84 50.91,10.84 50.98,10.92 50.98,11.93 51.06,12 51.16,12 51.24,11.93 51.24,10.92 51.31,10.84 51.77,10.84 52.36,11.44 53.01,11.44 53.49,10.96 v1(53.94,10.96)
  BOTTOM w0.127: v1(53.94,10.96) 53.41,10.96 51.6,9.16 51.33,9.16 51.26,9.23 51.26,9.47 51.19,9.55 51.08,9.55 51.01,9.47 51.01,9.23 50.93,9.16 50.68,9.16 50.42,8.9 50.34,8.9 50.16,8.72 43.36,8.72 41.98,10.1 41.98,10.48 40.15,12.3 39.2,12.3 39.02,12.13 38.68,12.13 38.45,12.36 J1.40
OLED0 DATA2: length 56.7
  TOP w0.114: v1(50.31,9.36) 50.63,9.68 50.63,9.79 49.99,10.42 49.99,10.53 50.07,10.6 50.17,10.6 50.81,9.97 50.91,9.97 51.09,10.15 51.09,10.69 51.02,10.77 50.63,10.77 50.56,10.84 50.56,10.95 50.63,11.02 51.02,11.02 51.09,11.1 51.09,11.53 50.91,11.71 50.81,11.71 49.61,10.51 49.5,10.51 49.43,10.58 49.43,10.69 50.63,11.89 50.63,11.99 50.45,12.17 50.34,12.17 49.58,11.41 49.48,11.41 49.4,11.48 49.4,11.59 50.16,12.35 50.16,12.46 49.93,12.7 49.82,12.7 49.61,12.49 49.51,12.49 49.43,12.56 49.43,12.67 49.64,12.88 49.64,12.98 49.32,13.3 49.32,14.11 49.31,14.12 49.31,14.26 D1.N5
  P w0.127: v1(31.26,10.81) 31.26,10.33 30.18,9.25 30.18,9.14 30.25,9.07 30.36,9.07 31.7,10.41 31.8,10.41 31.88,10.34 31.88,10.23 30.54,8.89 30.54,8.78 30.61,8.71 30.72,8.71 32.06,10.05 32.16,10.05 32.24,9.98 32.24,9.87 30.9,8.53 30.9,8.42 30.97,8.35 31.08,8.35 32.42,9.69 32.52,9.69 32.8,9.41 32.8,9.31 32.05,8.55 32.05,8.44 32.12,8.37 32.23,8.37 32.98,9.13 33.09,9.13 33.3,8.91 33.3,8.8 33.14,8.64 33.14,8.54 33.22,8.46 33.32,8.46 33.48,8.63 33.59,8.63 33.9,8.32 37.41,8.32 37.54,8.19 46.85,8.19 47.61,8.95 47.61,9.82 47.69,9.89 47.79,9.89 47.87,9.82 47.87,8.95 47.94,8.88 49.82,8.88 v1(50.31,9.36)
  BOTTOM w0.127: v1(31.26,10.81) 31.26,12.3 31.81,12.86 J1.37
OLED0 DATA3: length 56.9
  TOP w0.114: D1.M1 44.95,12.89 44.95,12.12 45.02,12.05 45.2,12.05 45.28,11.97 45.28,11.87 45.2,11.8 45.02,11.8 44.95,11.72 44.95,11.62 45.02,11.54 45.2,11.54 45.28,11.47 45.28,11.36 45.2,11.29 45.02,11.29 44.95,11.21 44.95,10.7 45.46,10.19 45.46,9.97 45.74,9.69 45.74,9.58 44.46,8.3 44.46,8.2 44.53,8.12 44.64,8.12 45.92,9.4 46.02,9.4 46.24,9.19 46.24,9.08 45.23,8.08 45.23,7.97 45.31,7.9 45.41,7.9 46.41,8.9 46.52,8.9 46.59,8.83 46.59,8.72 45.59,7.72 45.59,7.61 45.66,7.54 45.77,7.54 46.77,8.54 47.07,8.54 47.15,8.47 47.15,8.16 47.22,8.09 47.33,8.09 47.4,8.16 47.4,8.47 47.47,8.54 48.1,8.54 49.8,6.84 49.8,4.51 49.39,4.1 46.62,4.1 46,4.72 46,4.83 46.24,5.06 46.24,5.17 46.17,5.24 46.06,5.24 45.82,5.01 45.72,5.01 45.64,5.08 45.64,5.18 45.88,5.42 45.88,5.53 45.81,5.6 45.7,5.6 45.46,5.36 45.36,5.36 45.14,5.58 45.14,5.68 45.79,6.33 45.79,6.43 45.71,6.51 45.61,6.51 44.96,5.86 44.86,5.86 44.68,6.05 44.68,6.15 44.9,6.38 44.9,6.48 44.83,6.56 44.72,6.56 44.5,6.33 44.39,6.33 44.21,6.51 42.48,6.51 42.36,6.64 42.36,7.42 42.28,7.49 41.19,7.49 41.11,7.57 41.11,7.67 41.19,7.75 42.28,7.75 42.36,7.82 42.36,9.08 42.28,9.15 41.97,9.15 41.9,9.23 41.9,9.33 41.97,9.41 42.28,9.41 42.36,9.48 42.36,9.81 42.06,10.1 42.06,10.92 41.99,11 41.26,11 41.19,11.07 41.19,11.18 41.26,11.25 41.99,11.25 42.06,11.33 42.06,11.71 41.99,11.79 40.58,11.79 40.5,11.86 40.5,11.97 40.58,12.04 41.99,12.04 42.06,12.11 v1(42.06,12.56)
  BOTTOM w0.127: v1(42.06,12.56) 41.68,12.94 38.51,12.94 38.43,12.86 J1.38
OLED0 DATA4: length 56.8
  TOP w0.114: v1(28.18,9.79) 28.5,10.1 28.95,10.1 29.23,9.83 29.34,9.83 30.16,10.65 30.27,10.65 30.34,10.58 30.34,10.47 29.52,9.65 29.52,9.54 29.59,9.47 29.7,9.47 30.52,10.29 30.63,10.29 30.7,10.22 30.7,10.11 29.88,9.29 29.88,9.18 30.18,8.88 30.96,8.88 31.03,8.95 31.03,10.2 31.11,10.27 31.21,10.27 31.29,10.2 31.29,8.95 31.36,8.88 31.47,8.88 31.54,8.95 31.54,10.2 31.61,10.27 31.72,10.27 31.79,10.2 31.79,8.95 31.87,8.88 31.97,8.88 32.05,8.95 32.05,10.2 32.12,10.27 32.23,10.27 32.3,10.2 32.3,8.95 32.38,8.88 36.39,8.88 38.98,6.28 41.3,6.28 41.83,5.75 43.94,5.75 46.27,3.41 49.82,3.41 51.27,4.86 51.27,6.77 48.57,9.47 D1.P4
  BOTTOM w0.127: v1(28.18,9.79) 31.48,13.09 32.92,13.09 33.19,13.36 J1.35
OLED0 DATA5: length 57
  TOP w0.114: D1.N1 46.14,13.58 46.14,13.32 46.07,13.24 45.78,13.24 45.7,13.17 45.7,13.07 45.78,12.99 46.07,12.99 46.14,12.92 46.14,12.81 46.07,12.74 45.78,12.74 45.7,12.66 45.7,12.56 45.78,12.48 46.07,12.48 46.14,12.41 46.14,10.83 46.07,10.75 45.57,10.75 45.5,10.68 45.5,10.57 45.57,10.5 46.07,10.5 46.55,10.02 46.55,9.2 46.79,8.95 48.05,8.95 50.03,6.97 50.03,4.63 50.01,4.62 50.01,4.39 49.47,3.85 46.5,3.85 44.13,6.21 42.27,6.21 41.61,6.87 41.41,6.87 41.36,6.92 40.14,6.92 39.42,7.64 39.42,7.74 39.6,7.92 39.71,7.92 40.3,7.33 40.4,7.33 40.48,7.4 40.48,7.51 39.88,8.1 39.88,8.21 39.96,8.28 40.06,8.28 40.66,7.69 40.76,7.69 40.83,7.76 40.83,7.87 40.24,8.46 40.24,8.57 40.32,8.64 40.42,8.64 41.01,8.05 41.12,8.05 41.19,8.12 41.19,8.23 40.6,8.82 40.6,8.92 40.82,9.14 40.93,9.14 41.94,8.13 42.05,8.13 42.12,8.2 42.12,8.31 41.61,8.82 41.61,8.93 41.67,8.98 41.67,9.09 41.59,9.16 41.49,9.16 41.43,9.11 41.32,9.11 41.11,9.32 41.11,9.43 41.6,9.92 41.6,10.03 41.42,10.21 41.42,10.31 41.56,10.45 41.56,10.56 41.49,10.63 41.38,10.63 41.24,10.49 41.14,10.49 41.07,10.56 40.96,10.56 40.72,10.32 40.62,10.32 40.54,10.25 40.54,10.14 40.95,9.74 40.95,9.63 40.77,9.45 40.56,9.45 40.48,9.37 40.48,9.16 40.41,9.09 40.2,9.09 40.12,9.02 40.12,8.91 40.12,8.8 40.05,8.73 39.94,8.73 39.84,8.73 39.77,8.66 39.77,8.55 39.77,8.45 39.24,7.92 39.14,7.92 38.96,8.1 38.96,8.21 39.81,9.06 39.81,9.16 39.73,9.24 39.63,9.24 39.36,8.97 39.26,8.97 39.06,9.17 38.95,9.17 38.88,9.09 38.88,8.99 39.08,8.79 39.08,8.69 38.78,8.39 38.67,8.39 38.34,8.71 38.34,8.86 38.31,8.89 38.31,9.12 38.2,9.23 38.2,9.6 38.13,9.67 38.02,9.67 37.95,9.6 37.69,9.6 37.49,9.79 v1(37.49,10.37)
  BOTTOM w0.127: J1.36 36.79,13.36 36.46,13.04 36.46,12.61 36.44,12.58 36.44,12.1 36.82,11.72 37.58,11.72 37.88,11.42 37.88,11.24 37.57,10.92 37.57,10.89 37.49,10.81 v1(37.49,10.37)
OLED0 DATA6: length 57.2
  TOP w0.114: v1(50.51,8.49) 49.87,8.49 48.82,9.55 48.82,14.26 D1.N4
  P w0.127: v1(50.51,8.49) 50.07,8.49 49.99,8.42 49.99,7.98 49.92,7.91 49.81,7.91 49.74,7.98 49.74,8.42 49.66,8.49 49.56,8.49 49.48,8.42 49.48,7.98 49.41,7.91 49.3,7.91 49.23,7.98 49.23,8.42 49.15,8.49 49.05,8.49 48.97,8.42 48.97,7.98 48.9,7.91 48.8,7.91 48.72,7.98 48.72,8.42 48.65,8.49 48.54,8.49 48.47,8.42 48.47,7.98 48.39,7.91 48.29,7.91 48.21,7.98 48.21,8.42 48.14,8.49 47.68,8.49 47.15,7.96 46.95,7.96 46.92,7.94 37.47,7.94 37.39,8.01 31.4,8.01 31.33,7.94 31.33,7.5 31.25,7.43 31.15,7.43 31.07,7.5 31.07,7.94 31,8.01 30.73,8.01 30.73,7.2 30.66,7.12 30.55,7.12 30.48,7.2 30.48,8.15 30.4,8.22 30.4,8.22 30.3,8.22 30.22,8.15 30.22,7.2 30.15,7.12 30.04,7.12 29.97,7.2 29.97,8.15 29.9,8.22 29.89,8.22 29.79,8.22 29.71,8.15 29.71,7.2 29.64,7.12 29.54,7.12 29.46,7.2 29.46,8.15 29.39,8.22 29.38,8.22 29.28,8.22 29.21,8.15 29.21,7.2 29.13,7.12 29.03,7.12 28.95,7.2 28.95,8.15 28.88,8.22 28.62,8.22 v1(28.31,7.91)
  BOTTOM w0.127: J1.33 33.19,13.86 32.8,13.47 30.62,13.47 29.37,12.22 29.37,12.12 29.7,11.79 29.7,11.68 29.62,11.61 29.52,11.61 29.19,11.94 29.08,11.94 29.01,11.86 29.01,11.76 29.34,11.43 29.34,11.32 29.26,11.25 29.16,11.25 28.83,11.58 28.72,11.58 28.65,11.5 28.65,11.4 28.98,11.07 28.98,10.97 28.9,10.89 28.8,10.89 28.47,11.22 28.37,11.22 28.29,11.14 28.29,11.04 28.62,10.71 28.62,10.61 28.54,10.53 28.44,10.53 28.11,10.86 28.01,10.86 27.78,10.63 27.78,8.44 v1(28.31,7.91)
OLED0 DATA7: length 56.7
  TOP w0.114: D1.P2 47.04,13.48 46.83,13.48 46.37,13.02 46.37,12.7 46.44,12.63 47.02,12.63 47.1,12.55 47.1,12.45 47.02,12.37 46.44,12.37 46.37,12.3 46.37,12.19 46.44,12.12 47.02,12.12 47.1,12.04 47.1,11.94 47.02,11.86 46.44,11.86 46.37,11.79 46.37,11.69 46.44,11.61 47.02,11.61 47.1,11.54 47.1,11.43 47.02,11.36 46.44,11.36 46.37,11.28 46.37,11.18 46.44,11.1 47.02,11.1 47.1,11.03 47.1,10.92 47.02,10.85 46.44,10.85 46.37,10.77 46.37,10.52 46.78,10.11 46.78,9.79 46.8,9.76 46.8,9.56 v1(46.99,9.37)
  P w0.127: v1(37.71,8.6) 42.45,8.6 42.52,8.67 42.52,9 42.59,9.08 42.7,9.08 42.77,9 42.77,8.67 42.85,8.6 43.26,8.6 43.35,8.68 43.35,9.34 43.27,9.41 42.95,9.41 42.87,9.49 42.87,9.59 42.95,9.67 43.27,9.67 43.35,9.74 43.35,9.85 43.27,9.92 42.95,9.92 42.87,10 42.87,10.1 42.95,10.17 43.27,10.17 43.35,10.25 43.35,10.35 43.27,10.43 42.95,10.43 42.87,10.5 42.87,10.61 42.95,10.68 43.27,10.68 43.35,10.76 43.35,11.01 43.42,11.09 43.53,11.09 43.6,11.01 43.6,8.8 43.86,8.8 43.86,11.01 43.93,11.09 44.04,11.09 44.11,11.01 44.11,8.68 44.19,8.6 44.29,8.6 44.36,8.67 44.36,11.01 44.44,11.09 44.54,11.09 44.62,11.01 44.62,8.67 44.69,8.6 45.02,8.6 45.09,8.67 45.09,9.01 45.17,9.08 45.27,9.08 45.35,9.01 45.35,8.67 45.42,8.6 46.09,8.6 46.17,8.67 46.17,9.24 46.09,9.31 45.53,9.31 45.46,9.39 45.46,9.49 45.53,9.57 46.09,9.57 46.17,9.64 46.17,9.74 46.09,9.82 45.53,9.82 45.46,9.89 45.46,10 45.53,10.07 46.09,10.07 46.17,10.15 46.17,10.25 46.09,10.33 45.53,10.33 45.46,10.4 45.46,10.51 45.53,10.58 46.09,10.58 46.17,10.66 46.17,10.91 46.24,10.98 46.35,10.98 46.42,10.91 46.42,10.74 46.5,10.67 46.85,10.67 46.93,10.59 46.93,10.49 46.85,10.41 46.5,10.41 46.42,10.34 46.42,10.23 46.5,10.16 46.85,10.16 46.93,10.08 46.93,9.98 46.85,9.9 46.5,9.9 46.42,9.83 46.42,8.67 46.5,8.6 46.75,8.6 46.99,8.84 v1(46.99,9.37)
  BOTTOM w0.127: v1(37.71,8.6) 37.71,9.04 37.05,9.7 37.05,11.14 36.15,12.03 36.05,12.03 35.9,11.88 35.79,11.88 35.72,11.96 35.72,12.06 35.87,12.21 35.87,12.32 35.6,12.58 35.6,13.12 36.35,13.86 J1.34
OLED0 DATA8: length 57.2
  TOP w0.114: v1(36.45,9.76) 36.06,10.16 v1(36.06,12.77) ; D1.M5 v2(48.82,14.76)
  P w0.127: v2(48.82,14.76) 49.04,14.98 49.04,15.12 49.11,15.18 49.11,15.42 48.46,16.06 44.19,16.06 41.07,12.94 36.67,12.94 36.5,12.77 v1(36.06,12.77)
  BOTTOM w0.127: J1.31 33.19,14.36 32.98,14.16 32.98,14.1 32.94,14.05 32.94,14 32.75,13.8 32.63,13.8 32.61,13.78 30.55,13.78 27.8,11.03 27.8,10.99 27.41,10.6 27.41,8.22 28.52,7.11 28.63,7.11 29.83,8.32 29.94,8.32 30.01,8.24 30.01,8.14 28.81,6.93 28.81,6.83 28.88,6.75 28.99,6.75 30.19,7.96 30.3,7.96 30.37,7.88 30.37,7.78 29.17,6.57 29.17,6.47 29.49,6.14 29.6,6.14 29.82,6.37 29.93,6.37 30,6.29 30,6.19 29.78,5.96 29.78,5.86 29.91,5.73 30.09,5.73 30.51,6.15 30.51,6.26 30.27,6.49 30.27,6.6 30.35,6.67 30.45,6.67 30.69,6.44 30.79,6.44 30.87,6.51 30.87,6.61 30.63,6.85 30.63,6.95 30.71,7.03 30.81,7.03 31.05,6.79 31.15,6.79 33.34,8.98 33.34,9.16 33.41,9.23 33.6,9.23 33.67,9.31 33.67,9.88 33.98,10.2 34.43,10.2 34.71,9.92 34.71,8.77 35.37,8.11 35.93,8.11 35.96,8.09 35.96,7.21 36.27,6.89 36.61,6.89 37,7.29 37,8.77 36.45,9.32 v1(36.45,9.76)
OLED0 DATA9: length 57
  TOP w0.114: v1(50.43,5.85) 50.43,6.87 50.24,7.06 50.24,7.06 48.14,9.17 48.13,9.17 47.32,9.98 47.32,10.22 47.33,10.22 47.33,10.82 47.34,10.83 47.34,13.26 47.84,13.76 47.84,13.9 47.83,13.91 47.83,14.11 47.84,14.12 47.84,14.27 D1.N3 ; v1(35.52,9.69) 35.52,12.23 v1(34.99,12.76)
  P w0.127: v1(50.43,5.85) 50.43,4.89 50,4.46 47.95,4.46 47.88,4.38 47.88,4.28 47.8,4.2 47.7,4.2 47.63,4.28 47.63,4.38 47.55,4.46 47.45,4.46 47.37,4.38 47.37,4.28 47.3,4.2 47.19,4.2 47.12,4.28 47.12,4.38 47.04,4.46 46.94,4.46 46.86,4.38 46.86,4.28 46.79,4.2 46.68,4.2 46.61,4.28 46.61,4.38 46.53,4.46 46.43,4.46 46.36,4.38 46.36,4.28 46.28,4.2 46.18,4.2 46.1,4.28 46.1,4.38 46.03,4.46 45.48,4.46 45.02,4.92 45.02,5.02 45.64,5.64 45.64,5.75 45.56,5.82 45.46,5.82 44.84,5.2 44.73,5.2 44.66,5.28 44.66,5.38 45.28,6 45.28,6.11 45.2,6.18 45.1,6.18 44.48,5.56 44.37,5.56 44.3,5.64 44.3,5.74 44.92,6.36 44.92,6.47 44.84,6.54 44.74,6.54 44.12,5.92 44.02,5.92 43.94,6 43.94,6.1 44.56,6.72 44.56,6.82 44.49,6.9 44.38,6.9 43.76,6.28 43.66,6.28 43.58,6.35 43.58,6.46 44.2,7.08 44.2,7.18 44.13,7.26 44.02,7.26 43.4,6.64 43.3,6.64 43.04,6.89 42.75,6.89 42.67,6.97 42.67,7.38 42.6,7.45 42.49,7.45 42.42,7.38 42.42,6.97 42.35,6.89 42.24,6.89 42.17,6.97 42.17,7.38 42.09,7.45 41.99,7.45 41.91,7.38 41.91,6.97 41.84,6.89 41.73,6.89 41.66,6.97 41.66,7.38 41.58,7.45 41.48,7.45 41.4,7.38 41.4,6.97 41.33,6.89 41.22,6.89 41.15,6.97 41.15,7.38 41.08,7.45 40.97,7.45 40.9,7.38 40.9,6.97 40.82,6.89 40.72,6.89 40.64,6.97 40.64,7.38 40.57,7.45 40.46,7.45 40.39,7.38 40.39,6.97 40.31,6.89 40.21,6.89 40.13,6.97 40.13,7.38 40.06,7.45 39.95,7.45 39.88,7.38 39.88,6.97 39.81,6.89 39.7,6.89 39.63,6.97 39.63,7.38 39.55,7.45 39.45,7.45 39.37,7.38 39.37,6.97 39.3,6.89 39.19,6.89 39.12,6.97 39.12,7.38 39.04,7.45 38.94,7.45 38.86,7.38 38.86,6.97 38.79,6.89 38.68,6.89 38.61,6.97 38.61,7.38 38.54,7.45 38.43,7.45 38.36,7.38 38.36,6.97 38.28,6.89 38.18,6.89 38.1,6.97 38.1,7.38 38.03,7.45 37.92,7.45 37.85,7.38 37.85,6.97 37.77,6.89 37.67,6.89 37.59,6.97 37.59,7.38 37.52,7.45 37.41,7.45 37.34,7.38 37.34,6.97 37.27,6.89 36.84,6.89 v1(36.44,7.3)
  BOTTOM w0.127: v1(34.99,12.76) 35.3,13.08 35.3,13.34 36.32,14.36 J1.32 ; v1(35.52,9.69) 35.46,9.63 35.46,9.45 36.44,8.47 v1(36.44,7.3)
OLED0 DATA10: length 56.9
  TOP w0.114: v2(49.32,14.75) 49.32,15.25 D1.L5
  P w0.127: v1(32.56,14.22) 32.25,13.9 29.25,13.9 29.02,13.68 29.02,13.12 29.15,12.99 29.49,12.99 29.56,13.06 29.56,13.67 29.64,13.74 29.74,13.74 29.82,13.67 29.82,13.06 29.89,12.99 30,12.99 30.07,13.06 30.07,13.67 30.14,13.74 30.25,13.74 30.32,13.67 30.32,13.06 30.4,12.99 30.5,12.99 30.58,13.06 30.58,13.67 30.65,13.74 30.76,13.74 30.83,13.67 30.83,13.06 30.91,12.99 31.01,12.99 31.09,13.06 31.09,13.67 31.16,13.74 31.27,13.74 31.34,13.67 31.34,13.06 31.41,12.99 31.52,12.99 31.59,13.06 31.59,13.67 31.67,13.74 31.77,13.74 31.85,13.67 31.85,13.06 31.92,12.99 32.03,12.99 32.1,13.06 32.1,13.67 32.18,13.74 32.28,13.74 32.36,13.67 32.36,13.06 32.43,12.99 32.88,12.99 32.96,13.06 32.96,14.01 33.03,14.08 33.14,14.08 33.21,14.01 33.21,13.06 33.29,12.99 33.39,12.99 33.46,13.06 33.46,14.01 33.54,14.08 33.64,14.08 33.72,14.01 33.72,13.52 33.79,13.45 34.21,13.45 34.28,13.52 34.28,13.88 34.36,13.96 34.46,13.96 34.53,13.88 34.53,13.52 34.61,13.45 35.68,13.45 36.23,14.01 36.49,14.01 36.56,13.93 36.56,13.59 36.64,13.51 36.74,13.51 36.82,13.59 36.82,13.93 36.89,14.01 37,14.01 37.07,13.93 37.07,13.59 37.15,13.51 37.25,13.51 37.33,13.59 37.33,13.93 37.4,14.01 37.5,14.01 37.58,13.93 37.58,13.59 37.65,13.51 37.76,13.51 37.83,13.59 37.83,13.93 37.91,14.01 38.01,14.01 38.09,13.93 38.09,13.59 38.16,13.51 38.27,13.51 38.34,13.59 38.34,13.93 38.42,14.01 38.52,14.01 38.6,13.93 38.6,13.59 38.67,13.51 38.77,13.51 38.85,13.59 38.85,13.93 38.92,14.01 39.18,14.01 39.25,13.93 39.25,13.83 39.33,13.75 39.43,13.75 39.51,13.83 39.51,13.93 39.58,14.01 39.69,14.01 39.76,13.93 39.76,13.83 39.83,13.75 39.94,13.75 40.01,13.83 40.01,13.93 40.09,14.01 40.19,14.01 40.27,13.93 40.27,13.83 40.34,13.75 40.45,13.75 40.52,13.83 40.52,13.93 40.6,14.01 41.81,14.01 44.38,16.57 44.49,16.57 44.63,16.43 44.74,16.43 44.81,16.5 44.81,16.61 44.67,16.75 44.67,16.86 44.86,17.05 45.12,17.05 45.19,16.98 45.19,16.37 45.26,16.29 45.37,16.29 45.44,16.37 45.44,16.98 45.52,17.05 45.62,17.05 45.7,16.98 45.7,16.37 45.77,16.29 45.88,16.29 45.95,16.37 45.95,16.98 46.03,17.05 46.13,17.05 46.21,16.98 46.21,16.37 46.28,16.29 46.39,16.29 46.46,16.37 46.46,16.98 46.53,17.05 46.64,17.05 46.71,16.98 46.71,16.37 46.79,16.29 46.89,16.29 46.97,16.37 46.97,16.98 47.04,17.05 47.15,17.05 47.22,16.98 47.22,16.37 47.3,16.29 47.4,16.29 47.48,16.37 47.48,16.98 47.55,17.05 48.23,17.05 48.41,16.87 48.41,16.77 48.3,16.65 48.3,16.55 48.37,16.47 48.48,16.47 48.59,16.59 48.7,16.59 48.77,16.52 48.77,16.41 48.66,16.29 48.66,16.19 48.73,16.11 48.84,16.11 48.95,16.23 49.06,16.23 49.13,16.16 49.13,16.05 49.02,15.94 49.02,15.83 49.09,15.76 49.2,15.76 49.31,15.87 49.42,15.87 49.68,15.61 49.68,15.43 49.32,15.08 v2(49.32,14.75)
  BOTTOM w0.127: v1(32.56,14.22) 32.56,14.66 32.77,14.86 J1.29
OLED0 DATA11: length 57
  TOP w0.114: D1.P3 48.3,13.77 48.3,13.5 48.23,13.43 47.98,13.43 47.91,13.35 47.91,13.25 47.98,13.17 48.23,13.17 48.3,13.1 48.3,12.82 48.23,12.75 47.67,12.75 47.6,12.67 47.6,12.57 47.67,12.49 48.23,12.49 48.3,12.42 48.3,12.31 48.23,12.24 47.67,12.24 47.6,12.16 47.6,12.06 47.67,11.98 48.23,11.98 48.3,11.91 48.3,11.8 48.23,11.73 47.67,11.73 47.6,11.65 47.6,11.55 47.67,11.48 48.23,11.48 48.3,11.4 48.3,11.3 48.23,11.22 47.67,11.22 47.6,11.15 47.6,11.04 47.67,10.97 48.23,10.97 48.3,10.89 48.3,10.79 48.23,10.71 47.67,10.71 47.6,10.64 47.6,10.53 47.67,10.46 48.23,10.46 48.3,10.38 48.3,10.28 48.23,10.21 47.67,10.21 47.6,10.13 47.6,10.03 47.67,9.95 48.23,9.95 48.3,9.88 48.3,9.38 50.87,6.82 50.87,4.86 49.65,3.64 49.57,3.64 49.56,3.63 46.41,3.63 46.39,3.64 46.37,3.64 44.03,5.98 41.98,5.98 41.26,6.69 39,6.69 38.73,6.97 38.73,7.07 39.14,7.49 39.14,7.59 39.07,7.67 38.96,7.67 38.55,7.25 38.44,7.25 38.37,7.33 38.37,7.43 38.78,7.85 38.78,7.95 38.71,8.03 38.6,8.03 38.19,7.61 38.08,7.61 38.01,7.69 38.01,7.79 38.42,8.21 38.42,8.31 38.35,8.39 38.24,8.39 37.83,7.97 37.72,7.97 37.08,8.61 37.08,8.72 37.61,9.25 37.61,9.35 37.54,9.43 37.43,9.43 36.9,8.9 36.8,8.9 36.72,8.97 36.72,9.08 37.25,9.61 37.25,9.71 37.18,9.79 37.07,9.79 36.65,9.36 36.2,9.36 36.05,9.52 36.05,9.73 35.88,9.9 35.88,9.91 35.77,10.02 35.77,12.49 35.65,12.61 35.65,12.62 35.53,12.74 35.53,12.92 36.03,13.43 36.14,13.43 36.31,13.25 36.42,13.25 36.49,13.33 36.49,13.43 36.32,13.61 36.32,13.71 36.5,13.89 36.5,14.13 36.58,14.2 36.85,14.2 36.92,14.27 36.92,14.38 36.85,14.45 36.58,14.45 36.4,14.63 36.4,14.74 36.63,14.98 36.63,15.08 36.56,15.16 36.45,15.16 36.22,14.92 36.11,14.92 36.02,15.01 35.13,15.01 35,14.88 35,14.31 35.02,14.3 v1(35.02,13.85)
  BOTTOM w0.127: J1.30 35.14,14.86 35.02,14.74 v1(35.02,13.85)
OLED0 DATA12: length 57.2
  TOP w0.114: D1.E13 53.31,18.27 53.67,18.27 53.81,18.4 v1(57.95,18.4)
  P w0.127: v1(27.4,11.16) 27.84,11.16 27.89,11.21 32.22,11.21 32.87,10.57 35.08,10.57 35.63,11.11 40.28,11.11 40.34,11.06 v1(40.78,11.06) ; v1(54.57,11.49) 55.44,12.36 56.15,12.36 57.25,13.45 57.25,17.69 v1(57.95,18.4)
  BOTTOM w0.127: J1.27 31.6,15.36 30.86,14.62 30.86,14.52 31.03,14.34 31.03,14.24 30.96,14.16 30.85,14.16 30.68,14.34 30.57,14.34 v1(27.4,11.16) ; v1(40.78,11.06) 40.78,10.62 43.32,8.08 43.32,8 43.56,7.76 43.9,7.76 44.02,7.89 44.2,7.89 44.28,7.96 44.28,8.4 44.35,8.47 44.46,8.47 44.53,8.4 44.53,7.96 44.6,7.89 44.71,7.89 44.78,7.96 44.78,8.4 44.86,8.47 44.96,8.47 45.04,8.4 45.04,7.96 45.11,7.89 45.22,7.89 45.29,7.96 45.29,8.4 45.37,8.47 45.47,8.47 45.55,8.4 45.55,7.96 45.62,7.89 50.59,7.89 50.92,8.22 50.92,8.66 51.15,8.9 52.8,8.9 54.57,10.68 v1(54.57,11.49)
OLED0 DATA13: length 56.2
  TOP w0.114: v1(56.43,22.77) 55.96,22.3 55.33,22.3 54.88,22.74 54.06,22.74 53.99,22.66 53.99,22.42 53.91,22.35 53.81,22.35 53.74,22.42 53.74,22.66 53.66,22.74 53.56,22.74 53.48,22.66 53.48,22.42 53.41,22.35 53.3,22.35 53.23,22.42 53.23,22.66 53.15,22.74 52.23,22.74 51.81,22.32 51.81,22.06 51.81,22.05 51.81,21.71 51.81,21.7 51.81,21.09 52.07,20.84 D1.A11 ; v1(36.03,15.76) 35.63,15.35 34.66,15.35 34.1,15.91 34.1,19.77 34.28,19.95 34.28,20.05 33.74,20.6 33.74,20.7 33.81,20.78 33.92,20.78 34.46,20.23 34.57,20.23 34.64,20.31 34.64,20.41 34.1,20.96 34.1,21.06 34.17,21.14 34.28,21.14 34.82,20.59 34.93,20.59 35,20.67 35,20.77 34.45,21.32 34.45,21.42 34.53,21.5 34.63,21.5 35.18,20.95 35.28,20.95 35.36,21.03 35.36,21.13 34.81,21.68 34.81,21.78 34.89,21.86 34.99,21.86 35.54,21.31 35.64,21.31 35.72,21.38 35.72,21.49 35.17,22.03 35.17,22.14 35.25,22.21 35.35,22.21 35.9,21.67 36,21.67 36.08,21.74 36.08,21.85 35.53,22.39 35.53,22.5 35.61,22.57 35.71,22.57 36.26,22.03 36.36,22.03 36.44,22.1 36.44,22.21 35.89,22.75 35.89,22.86 35.97,22.93 36.07,22.93 36.62,22.39 36.72,22.39 36.8,22.46 36.8,22.57 36.25,23.11 36.25,23.22 36.33,23.29 36.43,23.29 36.98,22.75 37.08,22.75 37.26,22.93 37.26,23.03 36.47,23.82 36.47,23.92 36.55,24 36.65,24 37.25,23.4 37.96,23.4 37.97,23.39 38.31,23.39 38.32,23.4 v1(38.83,23.4)
  BOTTOM w0.127: v1(38.83,23.4) 39.46,24.04 51.04,24.04 51.78,23.3 55.89,23.3 v1(56.43,22.77) ; J1.28 36.43,15.36 v1(36.03,15.76)
